# Altium PCB wsg1.0.PcbDoc (part 1 of 3)
Units mm, origin at the board's own origin, x right, y up, seen from the top; angles counter-clockwise.
Board outline 55.37 x 28.61 mm, 4 copper layers (F.Cu, In1.Cu, In2.Cu, B.Cu); 38 components, 55 nets, 181 pads, 63 vias.
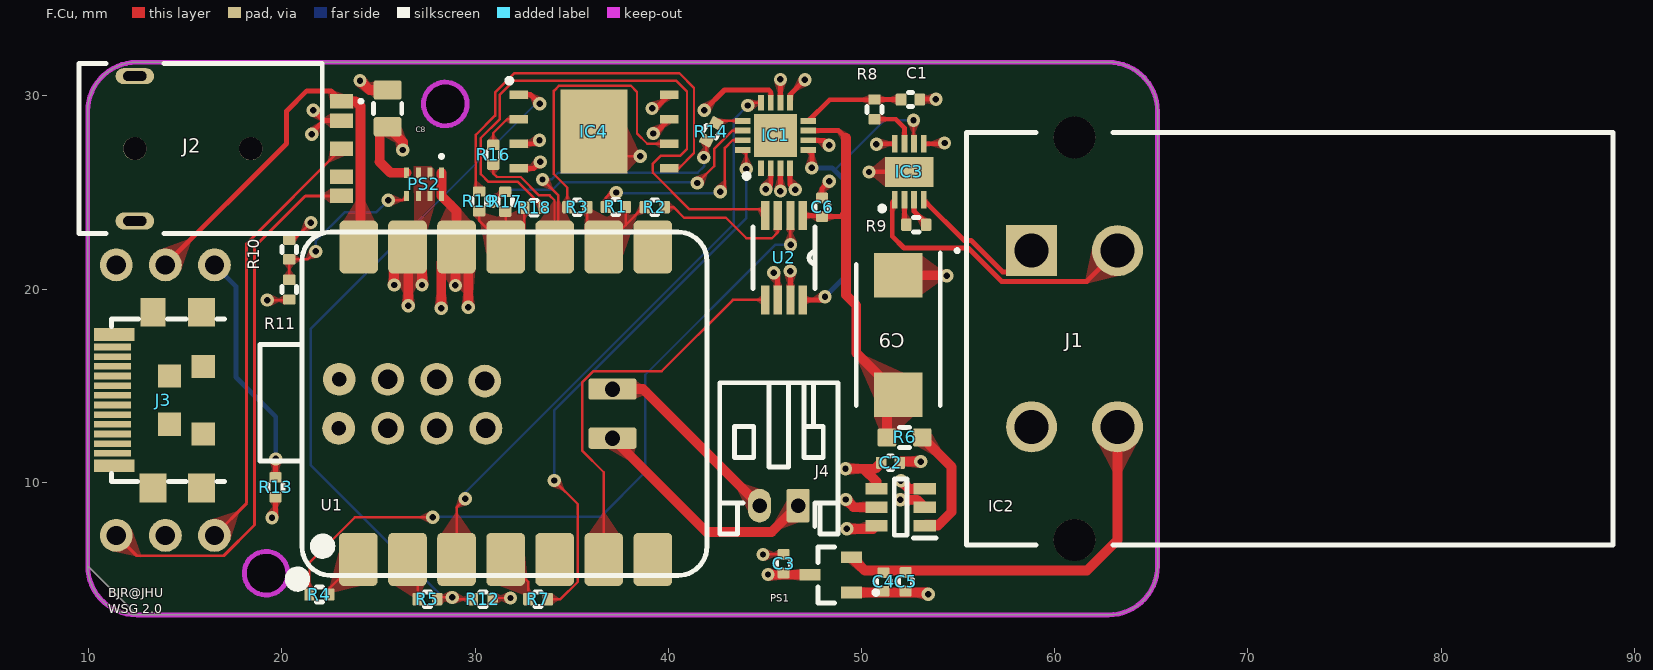
[diagram p0: F.Cu view]
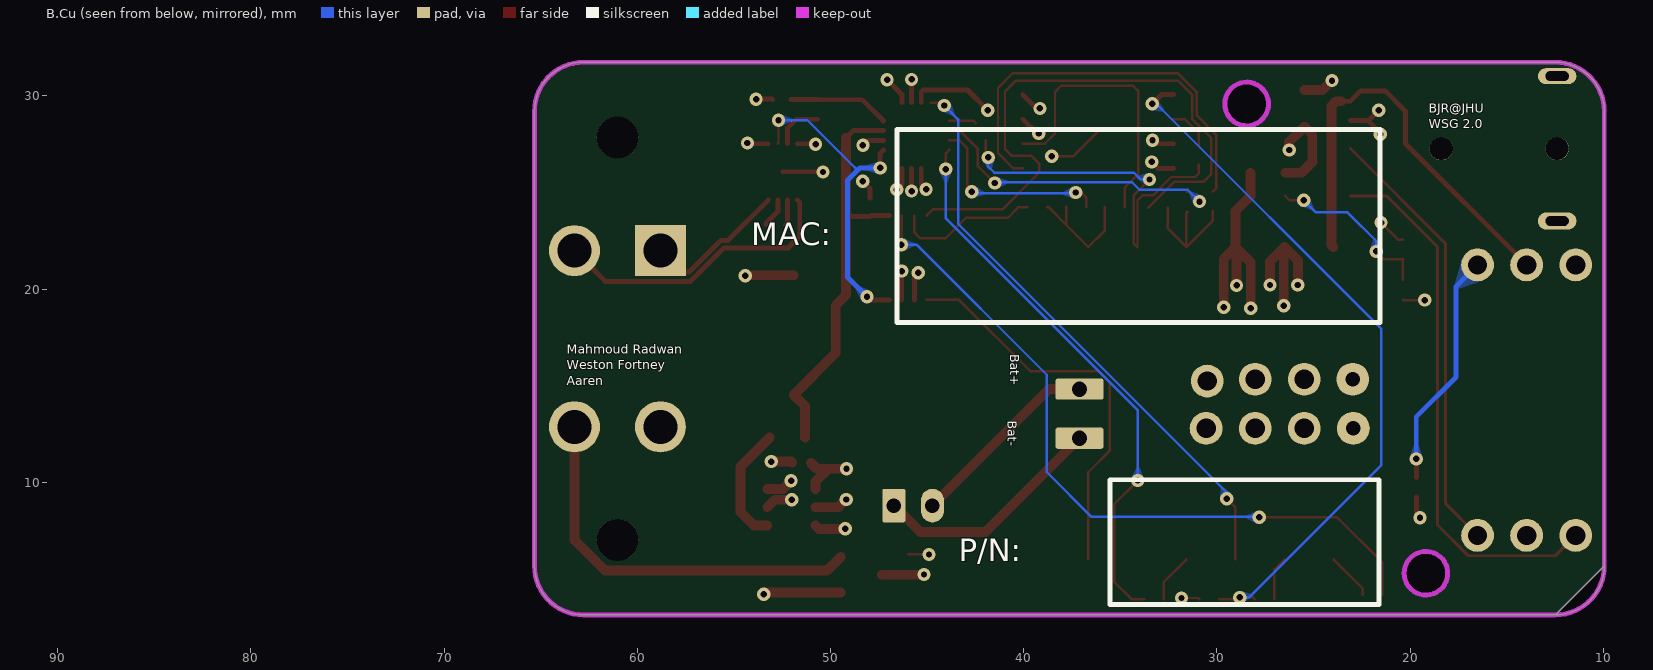
[diagram p1: B.Cu view, seen from below]
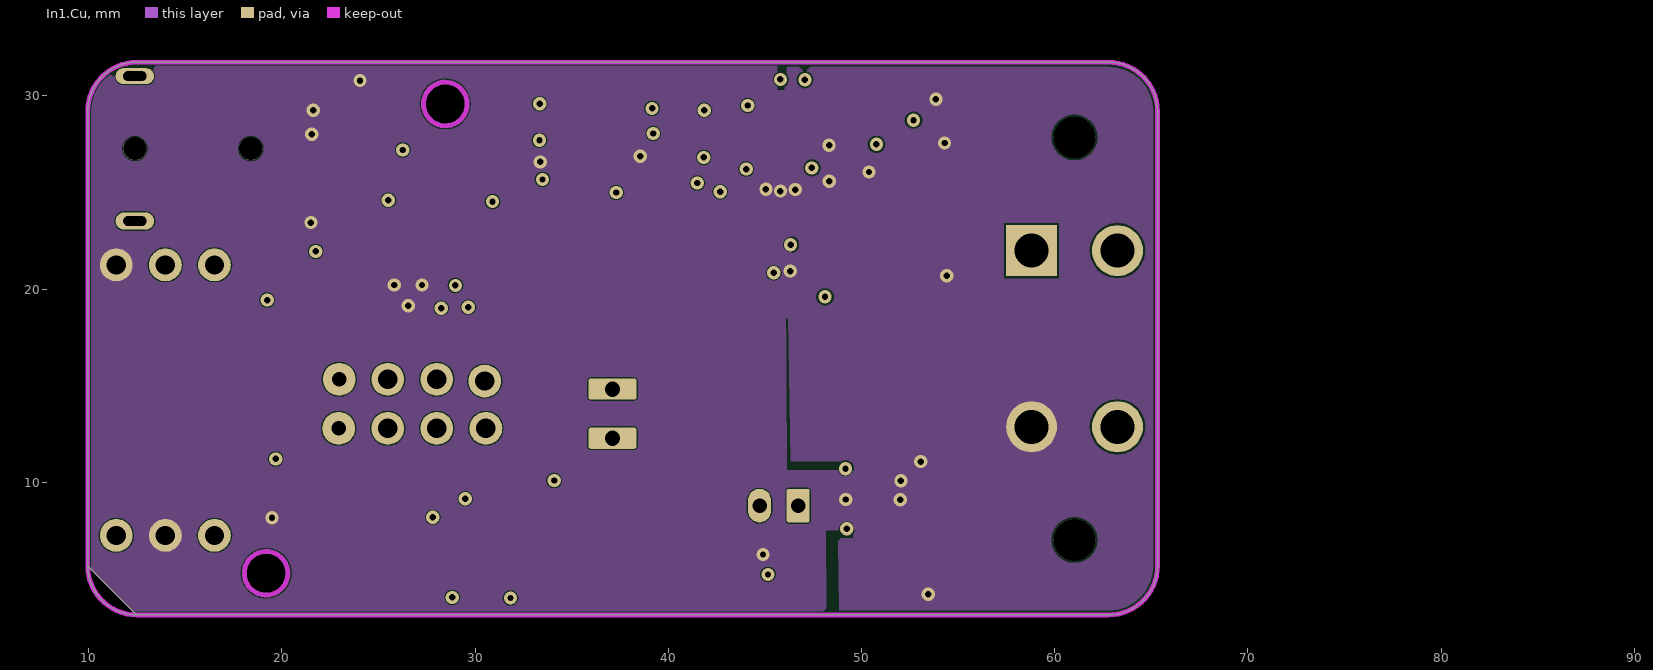
[diagram p2: In1.Cu]
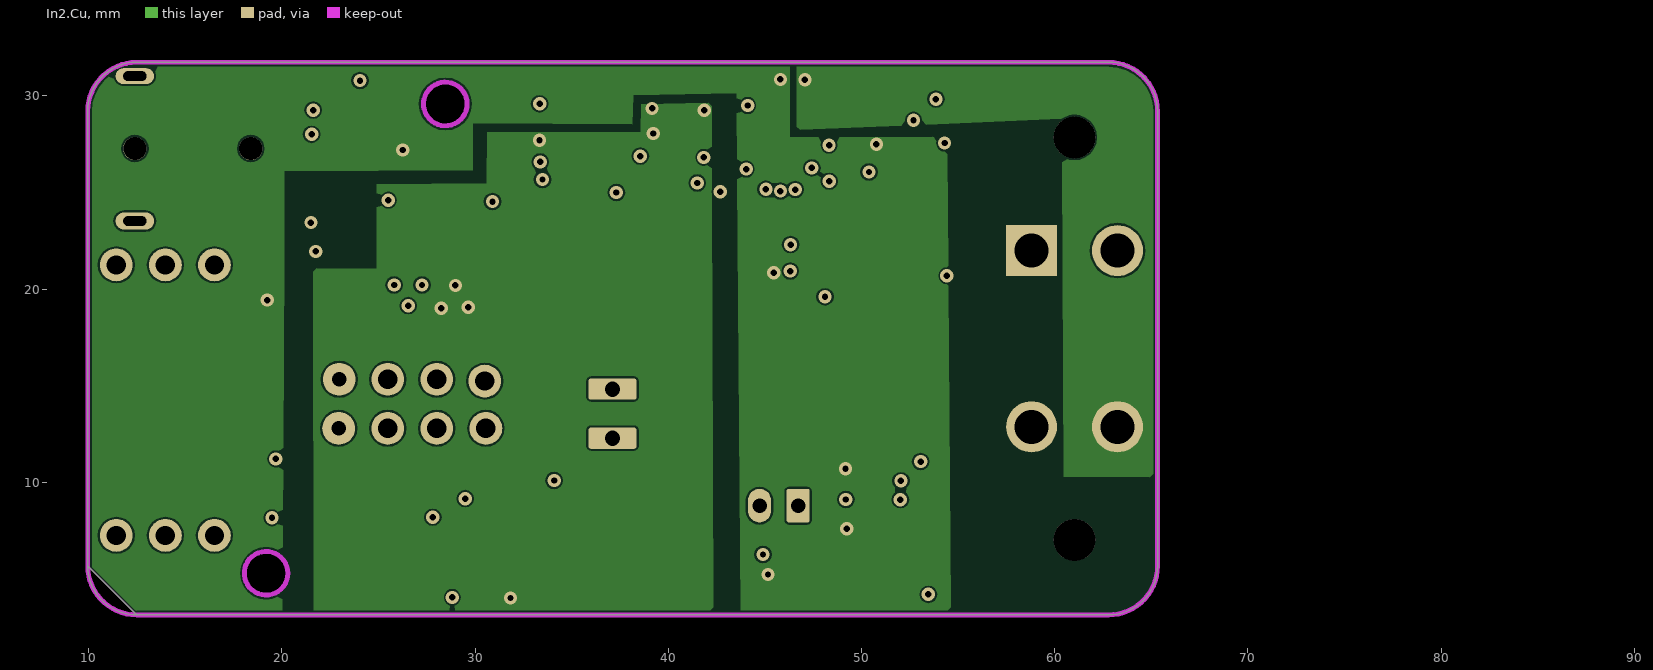
[diagram p3: In2.Cu]

## Layer stack, top to bottom
F.Mask: solder mask 0.0102, Solder Resist, Dk 3.5
F.Cu: signal copper 0.0356
Dielectric 1: dielectric 0.32, FR-4, Dk 4.8
In1.Cu: signal copper 0.0356
Dielectric2: dielectric 0.32, FR-4, Dk 4.8
In2.Cu: signal copper 0.0356
Dielectric3: dielectric 0.32, FR-4, Dk 4.8
B.Cu: signal copper 0.0356
B.Mask: solder mask 0.0102, Solder Resist, Dk 3.5

## Board outline
9.95,5.672 ccw(c12.49,5.672) 12.49,3.132 62.782,3.132 ccw(c62.782,5.672) 65.322,5.672 65.322,29.199 ccw(c62.782,29.199) 12.49,31.739 ccw(c12.49,29.199) 9.95,29.199 9.95,5.672 ccw(c12.49,5.672) 9.95,5.672
cut-out: 20.321,5.291 20.282,5.586 20.169,5.861 19.987,6.097 19.751,6.279 19.476,6.392 19.181,6.431 18.886,6.392 18.611,6.279 18.375,6.097 18.194,5.861 18.08,5.586 18.041,5.291 18.08,4.996 18.194,4.721 18.375,4.485 18.611,4.304 18.886,4.19 19.181,4.151 19.476,4.19 19.751,4.304 19.987,4.485 20.169,4.721 20.282,4.996 20.321,5.291
cut-out: 29.6,29.58 29.561,29.875 29.448,30.15 29.266,30.386 29.03,30.567 28.755,30.681 28.46,30.72 28.165,30.681 27.89,30.567 27.654,30.386 27.473,30.15 27.359,29.875 27.32,29.58 27.359,29.285 27.473,29.01 27.654,28.774 27.89,28.593 28.165,28.479 28.46,28.44 28.755,28.479 29.03,28.593 29.266,28.774 29.448,29.01 29.561,29.285 29.6,29.58

## Design rules (kind name [scope] priority, off if disabled: settings)
Clearance "Clearence 0.1_Polygon" [InNamedPolygon('F.Cu-GNDA-15') OR InNamedPolygon('In1.Cu-GNDA') OR InNamedPolygon('In1.Cu-GNDA-1') OR InNamedPolygon('In1.Cu-GNDA-2') OR InNamedPolygon('In1.Cu-GNDA-4') OR InNamedPolygon('In2.Cu-3V3') OR InNamedPolygon('In2.Cu-5V5') OR InNamedPolygon('In2.Cu-2V5 Ref')] p1: gap=0.1 ignorepadtopadclearanceinfootprint=FALSE
Clearance "Clearence 0.05_Polygon" [InNamedPolygon('In1.Cu-GNDA-3')] p2: gap=0.05 ignorepadtopadclearanceinfootprint=FALSE
MinimumSolderMaskSliver [All] p1: minsoldermaskwidth=0
PolygonConnect Polygon_B.Cu-CS-MEM-1_ConnectDirect [IsNamedPolygon('B.Cu-CS-MEM-1')] p1: connectstyle=Direct reliefconductorwidth=0.254 reliefentries=4 polygonreliefangle="90 Angle" airgapwidth=0.254
PolygonConnect "Polygon_B.Cu-DAC Bias-4_ConnectDirect" [IsNamedPolygon('B.Cu-DAC Bias-4')] p2: connectstyle=Direct reliefconductorwidth=0.254 reliefentries=4 polygonreliefangle="90 Angle" airgapwidth=0.254
PolygonConnect Polygon_B.Cu-CS-ADC-1_ConnectDirect [IsNamedPolygon('B.Cu-CS-ADC-1')] p3: connectstyle=Direct reliefconductorwidth=0.254 reliefentries=4 polygonreliefangle="90 Angle" airgapwidth=0.254
PolygonConnect Polygon_B.Cu-Net-(J3-CC)-1_ConnectDirect [IsNamedPolygon('B.Cu-Net-(J3-CC)-1')] p4: connectstyle=Direct reliefconductorwidth=0.254 reliefentries=4 polygonreliefangle="90 Angle" airgapwidth=0.254
PolygonConnect Polygon_B.Cu-MOSI_ADC-1_ConnectDirect [IsNamedPolygon('B.Cu-MOSI_ADC-1')] p5: connectstyle=Direct reliefconductorwidth=0.254 reliefentries=4 polygonreliefangle="90 Angle" airgapwidth=0.254
PolygonConnect "Polygon_B.Cu-DAC Bias-3_ConnectDirect" [IsNamedPolygon('B.Cu-DAC Bias-3')] p6: connectstyle=Direct reliefconductorwidth=0.254 reliefentries=4 polygonreliefangle="90 Angle" airgapwidth=0.254
PolygonConnect "Polygon_B.Cu-ADC DReady-1_ConnectDirect" [IsNamedPolygon('B.Cu-ADC DReady-1')] p7: connectstyle=Direct reliefconductorwidth=0.254 reliefentries=4 polygonreliefangle="90 Angle" airgapwidth=0.254
PolygonConnect Polygon_B.Cu-CS-DAC-1_ConnectDirect [IsNamedPolygon('B.Cu-CS-DAC-1')] p8: connectstyle=Direct reliefconductorwidth=0.254 reliefentries=4 polygonreliefangle="90 Angle" airgapwidth=0.254
PolygonConnect Polygon_B.Cu-SCLK_ADC-1_ConnectDirect [IsNamedPolygon('B.Cu-SCLK_ADC-1')] p9: connectstyle=Direct reliefconductorwidth=0.254 reliefentries=4 polygonreliefangle="90 Angle" airgapwidth=0.254
PolygonConnect Polygon_B.Cu-CS-DAC_ConnectDirect [IsNamedPolygon('B.Cu-CS-DAC')] p10: connectstyle=Direct reliefconductorwidth=0.254 reliefentries=4 polygonreliefangle="90 Angle" airgapwidth=0.254
PolygonConnect Polygon_B.Cu-Net-(PS2-FB)-1_ConnectDirect [IsNamedPolygon('B.Cu-Net-(PS2-FB)-1')] p11: connectstyle=Direct reliefconductorwidth=0.254 reliefentries=4 polygonreliefangle="90 Angle" airgapwidth=0.254
PolygonConnect "Polygon_B.Cu-DAC Bias-2_ConnectDirect" [IsNamedPolygon('B.Cu-DAC Bias-2')] p12: connectstyle=Direct reliefconductorwidth=0.254 reliefentries=4 polygonreliefangle="90 Angle" airgapwidth=0.254
PolygonConnect Polygon_B.Cu-Net-(J3-CC)_ConnectDirect [IsNamedPolygon('B.Cu-Net-(J3-CC)')] p13: connectstyle=Direct reliefconductorwidth=0.254 reliefentries=4 polygonreliefangle="90 Angle" airgapwidth=0.254
PolygonConnect Polygon_B.Cu-CS-MEM_ConnectDirect [IsNamedPolygon('B.Cu-CS-MEM')] p14: connectstyle=Direct reliefconductorwidth=0.254 reliefentries=4 polygonreliefangle="90 Angle" airgapwidth=0.254
PolygonConnect "Polygon_B.Cu-ADC DReady_ConnectDirect" [IsNamedPolygon('B.Cu-ADC DReady')] p15: connectstyle=Direct reliefconductorwidth=0.254 reliefentries=4 polygonreliefangle="90 Angle" airgapwidth=0.254
PolygonConnect Polygon_B.Cu-MOSI_ADC_ConnectDirect [IsNamedPolygon('B.Cu-MOSI_ADC')] p16: connectstyle=Direct reliefconductorwidth=0.254 reliefentries=4 polygonreliefangle="90 Angle" airgapwidth=0.254
PolygonConnect Polygon_B.Cu-CS-ADC_ConnectDirect [IsNamedPolygon('B.Cu-CS-ADC')] p17: connectstyle=Direct reliefconductorwidth=0.254 reliefentries=4 polygonreliefangle="90 Angle" airgapwidth=0.254
PolygonConnect Polygon_B.Cu-Net-(PS2-FB)_ConnectDirect [IsNamedPolygon('B.Cu-Net-(PS2-FB)')] p18: connectstyle=Direct reliefconductorwidth=0.254 reliefentries=4 polygonreliefangle="90 Angle" airgapwidth=0.254
PolygonConnect "Polygon_B.Cu-DAC Bias-1_ConnectDirect" [IsNamedPolygon('B.Cu-DAC Bias-1')] p19: connectstyle=Direct reliefconductorwidth=0.254 reliefentries=4 polygonreliefangle="90 Angle" airgapwidth=0.254
PolygonConnect "Polygon_B.Cu-DAC Bias_ConnectDirect" [IsNamedPolygon('B.Cu-DAC Bias')] p20: connectstyle=Direct reliefconductorwidth=0.254 reliefentries=4 polygonreliefangle="90 Angle" airgapwidth=0.254
PolygonConnect Polygon_B.Cu-SCLK_ADC_ConnectDirect [IsNamedPolygon('B.Cu-SCLK_ADC')] p21: connectstyle=Direct reliefconductorwidth=0.254 reliefentries=4 polygonreliefangle="90 Angle" airgapwidth=0.254
PolygonConnect Polygon_B.Cu-MISO-1_ConnectDirect [IsNamedPolygon('B.Cu-MISO-1')] p22: connectstyle=Direct reliefconductorwidth=0.254 reliefentries=4 polygonreliefangle="90 Angle" airgapwidth=0.254
PolygonConnect Polygon_B.Cu-MISO_ConnectDirect [IsNamedPolygon('B.Cu-MISO')] p23: connectstyle=Direct reliefconductorwidth=0.254 reliefentries=4 polygonreliefangle="90 Angle" airgapwidth=0.254
PolygonConnect "Polygon_In2.Cu-2V5 Ref_ConnectDirect" [IsNamedPolygon('In2.Cu-2V5 Ref')] p24: connectstyle=Direct reliefconductorwidth=0.254 reliefentries=4 polygonreliefangle="90 Angle" airgapwidth=0.254
PolygonConnect Polygon_In2.Cu-5V5_ConnectDirect [IsNamedPolygon('In2.Cu-5V5')] p25: connectstyle=Direct reliefconductorwidth=0.254 reliefentries=4 polygonreliefangle="90 Angle" airgapwidth=0.254
PolygonConnect Polygon_In2.Cu-3V3_ConnectDirect [IsNamedPolygon('In2.Cu-3V3')] p26: connectstyle=Direct reliefconductorwidth=0.254 reliefentries=4 polygonreliefangle="90 Angle" airgapwidth=0.254
PolygonConnect Polygon_In1.Cu-GNDA-4_ConnectDirect [IsNamedPolygon('In1.Cu-GNDA-4')] p27: connectstyle=Direct reliefconductorwidth=0.254 reliefentries=4 polygonreliefangle="90 Angle" airgapwidth=0.254
PolygonConnect Polygon_In1.Cu-GNDA-3_ConnectDirect [IsNamedPolygon('In1.Cu-GNDA-3')] p28: connectstyle=Direct reliefconductorwidth=0.254 reliefentries=4 polygonreliefangle="90 Angle" airgapwidth=0.254
PolygonConnect Polygon_In1.Cu-GNDA-2_ConnectDirect [IsNamedPolygon('In1.Cu-GNDA-2')] p29: connectstyle=Direct reliefconductorwidth=0.254 reliefentries=4 polygonreliefangle="90 Angle" airgapwidth=0.254
PolygonConnect Polygon_In1.Cu-GNDA-1_ConnectDirect [IsNamedPolygon('In1.Cu-GNDA-1')] p30: connectstyle=Direct reliefconductorwidth=0.254 reliefentries=4 polygonreliefangle="90 Angle" airgapwidth=0.254
PolygonConnect Polygon_In1.Cu-GNDA_ConnectDirect [IsNamedPolygon('In1.Cu-GNDA')] p31: connectstyle=Direct reliefconductorwidth=0.254 reliefentries=4 polygonreliefangle="90 Angle" airgapwidth=0.254
PolygonConnect "Polygon_F.Cu-DAC Bias-5_ConnectDirect" [IsNamedPolygon('F.Cu-DAC Bias-5')] p32: connectstyle=Direct reliefconductorwidth=0.254 reliefentries=4 polygonreliefangle="90 Angle" airgapwidth=0.254
PolygonConnect "Polygon_F.Cu-DAC Bias-4_ConnectDirect" [IsNamedPolygon('F.Cu-DAC Bias-4')] p33: connectstyle=Direct reliefconductorwidth=0.254 reliefentries=4 polygonreliefangle="90 Angle" airgapwidth=0.254
PolygonConnect Polygon_F.Cu-Net-(PS2-FB)-5_ConnectDirect [IsNamedPolygon('F.Cu-Net-(PS2-FB)-5')] p34: connectstyle=Direct reliefconductorwidth=0.254 reliefentries=4 polygonreliefangle="90 Angle" airgapwidth=0.254
PolygonConnect Polygon_F.Cu-CS-DAC-3_ConnectDirect [IsNamedPolygon('F.Cu-CS-DAC-3')] p35: connectstyle=Direct reliefconductorwidth=0.254 reliefentries=4 polygonreliefangle="90 Angle" airgapwidth=0.254
PolygonConnect Polygon_F.Cu-MOSI-5_ConnectDirect [IsNamedPolygon('F.Cu-MOSI-5')] p36: connectstyle=Direct reliefconductorwidth=0.254 reliefentries=4 polygonreliefangle="90 Angle" airgapwidth=0.254
PolygonConnect Polygon_F.Cu-GNDA-48_ConnectDirect [IsNamedPolygon('F.Cu-GNDA-48')] p37: connectstyle=Direct reliefconductorwidth=0.254 reliefentries=4 polygonreliefangle="90 Angle" airgapwidth=0.254
PolygonConnect Polygon_F.Cu-MOSI_FLASH-1_ConnectDirect [IsNamedPolygon('F.Cu-MOSI_FLASH-1')] p38: connectstyle=Direct reliefconductorwidth=0.254 reliefentries=4 polygonreliefangle="90 Angle" airgapwidth=0.254
PolygonConnect Polygon_F.Cu-FilteredSig-3_ConnectDirect [IsNamedPolygon('F.Cu-FilteredSig-3')] p39: connectstyle=Direct reliefconductorwidth=0.254 reliefentries=4 polygonreliefangle="90 Angle" airgapwidth=0.254
PolygonConnect Polygon_F.Cu-CS-ADC-3_ConnectDirect [IsNamedPolygon('F.Cu-CS-ADC-3')] p40: connectstyle=Direct reliefconductorwidth=0.254 reliefentries=4 polygonreliefangle="90 Angle" airgapwidth=0.254
PolygonConnect Polygon_F.Cu-GNDA-47_ConnectDirect [IsNamedPolygon('F.Cu-GNDA-47')] p41: connectstyle=Direct reliefconductorwidth=0.254 reliefentries=4 polygonreliefangle="90 Angle" airgapwidth=0.254
PolygonConnect Polygon_F.Cu-SCLK_ADC-3_ConnectDirect [IsNamedPolygon('F.Cu-SCLK_ADC-3')] p42: connectstyle=Direct reliefconductorwidth=0.254 reliefentries=4 polygonreliefangle="90 Angle" airgapwidth=0.254
PolygonConnect "Polygon_F.Cu-5V Reference-7_ConnectDirect" [IsNamedPolygon('F.Cu-5V Reference-7')] p43: connectstyle=Direct reliefconductorwidth=0.254 reliefentries=4 polygonreliefangle="90 Angle" airgapwidth=0.254
PolygonConnect Polygon_F.Cu-3V3-15_ConnectDirect [IsNamedPolygon('F.Cu-3V3-15')] p44: connectstyle=Direct reliefconductorwidth=0.254 reliefentries=4 polygonreliefangle="90 Angle" airgapwidth=0.254
PolygonConnect Polygon_F.Cu-MOSI-4_ConnectDirect [IsNamedPolygon('F.Cu-MOSI-4')] p45: connectstyle=Direct reliefconductorwidth=0.254 reliefentries=4 polygonreliefangle="90 Angle" airgapwidth=0.254
PolygonConnect Polygon_F.Cu-5V5-15_ConnectDirect [IsNamedPolygon('F.Cu-5V5-15')] p46: connectstyle=Direct reliefconductorwidth=0.254 reliefentries=4 polygonreliefangle="90 Angle" airgapwidth=0.254
PolygonConnect Polygon_F.Cu-MISO_ADC-1_ConnectDirect [IsNamedPolygon('F.Cu-MISO_ADC-1')] p47: connectstyle=Direct reliefconductorwidth=0.254 reliefentries=4 polygonreliefangle="90 Angle" airgapwidth=0.254
PolygonConnect Polygon_F.Cu-GNDA-46_ConnectDirect [IsNamedPolygon('F.Cu-GNDA-46')] p48: connectstyle=Direct reliefconductorwidth=0.254 reliefentries=4 polygonreliefangle="90 Angle" airgapwidth=0.254
PolygonConnect Polygon_F.Cu-3V3-14_ConnectDirect [IsNamedPolygon('F.Cu-3V3-14')] p49: connectstyle=Direct reliefconductorwidth=0.254 reliefentries=4 polygonreliefangle="90 Angle" airgapwidth=0.254
PolygonConnect Polygon_F.Cu-GNDA-45_ConnectDirect [IsNamedPolygon('F.Cu-GNDA-45')] p50: connectstyle=Direct reliefconductorwidth=0.254 reliefentries=4 polygonreliefangle="90 Angle" airgapwidth=0.254
PolygonConnect Polygon_F.Cu-GNDA-44_ConnectDirect [IsNamedPolygon('F.Cu-GNDA-44')] p51: connectstyle=Direct reliefconductorwidth=0.254 reliefentries=4 polygonreliefangle="90 Angle" airgapwidth=0.254
PolygonConnect Polygon_F.Cu-GNDA-43_ConnectDirect [IsNamedPolygon('F.Cu-GNDA-43')] p52: connectstyle=Direct reliefconductorwidth=0.254 reliefentries=4 polygonreliefangle="90 Angle" airgapwidth=0.254
PolygonConnect Polygon_F.Cu-MISO-5_ConnectDirect [IsNamedPolygon('F.Cu-MISO-5')] p53: connectstyle=Direct reliefconductorwidth=0.254 reliefentries=4 polygonreliefangle="90 Angle" airgapwidth=0.254
PolygonConnect "Polygon_F.Cu-2V5 Ref-3_ConnectDirect" [IsNamedPolygon('F.Cu-2V5 Ref-3')] p54: connectstyle=Direct reliefconductorwidth=0.254 reliefentries=4 polygonreliefangle="90 Angle" airgapwidth=0.254
PolygonConnect Polygon_F.Cu-3V3-13_ConnectDirect [IsNamedPolygon('F.Cu-3V3-13')] p55: connectstyle=Direct reliefconductorwidth=0.254 reliefentries=4 polygonreliefangle="90 Angle" airgapwidth=0.254
PolygonConnect Polygon_F.Cu-GNDA-42_ConnectDirect [IsNamedPolygon('F.Cu-GNDA-42')] p56: connectstyle=Direct reliefconductorwidth=0.254 reliefentries=4 polygonreliefangle="90 Angle" airgapwidth=0.254
PolygonConnect Polygon_F.Cu-Net-(U1-PA4_A1_D1)-1_ConnectDirect [IsNamedPolygon('F.Cu-Net-(U1-PA4_A1_D1)-1')] p57: connectstyle=Direct reliefconductorwidth=0.254 reliefentries=4 polygonreliefangle="90 Angle" airgapwidth=0.254
PolygonConnect Polygon_F.Cu-MOSI_ADC-3_ConnectDirect [IsNamedPolygon('F.Cu-MOSI_ADC-3')] p58: connectstyle=Direct reliefconductorwidth=0.254 reliefentries=4 polygonreliefangle="90 Angle" airgapwidth=0.254
PolygonConnect "Polygon_F.Cu-5V USB-5_ConnectDirect" [IsNamedPolygon('F.Cu-5V USB-5')] p59: connectstyle=Direct reliefconductorwidth=0.254 reliefentries=4 polygonreliefangle="90 Angle" airgapwidth=0.254
PolygonConnect Polygon_F.Cu-AmplifiedSig-1_ConnectDirect [IsNamedPolygon('F.Cu-AmplifiedSig-1')] p60: connectstyle=Direct reliefconductorwidth=0.254 reliefentries=4 polygonreliefangle="90 Angle" airgapwidth=0.254
PolygonConnect Polygon_F.Cu-GNDA-41_ConnectDirect [IsNamedPolygon('F.Cu-GNDA-41')] p61: connectstyle=Direct reliefconductorwidth=0.254 reliefentries=4 polygonreliefangle="90 Angle" airgapwidth=0.254
PolygonConnect Polygon_F.Cu-GNDA-40_ConnectDirect [IsNamedPolygon('F.Cu-GNDA-40')] p62: connectstyle=Direct reliefconductorwidth=0.254 reliefentries=4 polygonreliefangle="90 Angle" airgapwidth=0.254
PolygonConnect Polygon_F.Cu-SCLK-5_ConnectDirect [IsNamedPolygon('F.Cu-SCLK-5')] p63: connectstyle=Direct reliefconductorwidth=0.254 reliefentries=4 polygonreliefangle="90 Angle" airgapwidth=0.254
PolygonConnect Polygon_F.Cu-5V5-14_ConnectDirect [IsNamedPolygon('F.Cu-5V5-14')] p64: connectstyle=Direct reliefconductorwidth=0.254 reliefentries=4 polygonreliefangle="90 Angle" airgapwidth=0.254
PolygonConnect Polygon_F.Cu-SCLK_FLASH-1_ConnectDirect [IsNamedPolygon('F.Cu-SCLK_FLASH-1')] p65: connectstyle=Direct reliefconductorwidth=0.254 reliefentries=4 polygonreliefangle="90 Angle" airgapwidth=0.254
PolygonConnect Polygon_F.Cu-BAT--1_ConnectDirect [IsNamedPolygon('F.Cu-BAT--1')] p66: connectstyle=Direct reliefconductorwidth=0.254 reliefentries=4 polygonreliefangle="90 Angle" airgapwidth=0.254
PolygonConnect Polygon_F.Cu-MISO-4_ConnectDirect [IsNamedPolygon('F.Cu-MISO-4')] p67: connectstyle=Direct reliefconductorwidth=0.254 reliefentries=4 polygonreliefangle="90 Angle" airgapwidth=0.254
PolygonConnect Polygon_F.Cu-FilteredSig-2_ConnectDirect [IsNamedPolygon('F.Cu-FilteredSig-2')] p68: connectstyle=Direct reliefconductorwidth=0.254 reliefentries=4 polygonreliefangle="90 Angle" airgapwidth=0.254
PolygonConnect Polygon_F.Cu-MOSI_ADC-2_ConnectDirect [IsNamedPolygon('F.Cu-MOSI_ADC-2')] p69: connectstyle=Direct reliefconductorwidth=0.254 reliefentries=4 polygonreliefangle="90 Angle" airgapwidth=0.254
PolygonConnect Polygon_F.Cu-MOSI_FLASH_ConnectDirect [IsNamedPolygon('F.Cu-MOSI_FLASH')] p70: connectstyle=Direct reliefconductorwidth=0.254 reliefentries=4 polygonreliefangle="90 Angle" airgapwidth=0.254
PolygonConnect Polygon_F.Cu-GNDA-39_ConnectDirect [IsNamedPolygon('F.Cu-GNDA-39')] p71: connectstyle=Direct reliefconductorwidth=0.254 reliefentries=4 polygonreliefangle="90 Angle" airgapwidth=0.254
PolygonConnect "Polygon_F.Cu-5V Reference-6_ConnectDirect" [IsNamedPolygon('F.Cu-5V Reference-6')] p72: connectstyle=Direct reliefconductorwidth=0.254 reliefentries=4 polygonreliefangle="90 Angle" airgapwidth=0.254
PolygonConnect Polygon_F.Cu-GNDA-38_ConnectDirect [IsNamedPolygon('F.Cu-GNDA-38')] p73: connectstyle=Direct reliefconductorwidth=0.254 reliefentries=4 polygonreliefangle="90 Angle" airgapwidth=0.254
PolygonConnect "Polygon_F.Cu-5V USB-4_ConnectDirect" [IsNamedPolygon('F.Cu-5V USB-4')] p74: connectstyle=Direct reliefconductorwidth=0.254 reliefentries=4 polygonreliefangle="90 Angle" airgapwidth=0.254
PolygonConnect Polygon_F.Cu-GNDA-37_ConnectDirect [IsNamedPolygon('F.Cu-GNDA-37')] p75: connectstyle=Direct reliefconductorwidth=0.254 reliefentries=4 polygonreliefangle="90 Angle" airgapwidth=0.254
PolygonConnect Polygon_F.Cu-3V3-12_ConnectDirect [IsNamedPolygon('F.Cu-3V3-12')] p76: connectstyle=Direct reliefconductorwidth=0.254 reliefentries=4 polygonreliefangle="90 Angle" airgapwidth=0.254
PolygonConnect Polygon_F.Cu-Net-(U1-PA02_A0_D0)-1_ConnectDirect [IsNamedPolygon('F.Cu-Net-(U1-PA02_A0_D0)-1')] p77: connectstyle=Direct reliefconductorwidth=0.254 reliefentries=4 polygonreliefangle="90 Angle" airgapwidth=0.254
PolygonConnect "Polygon_F.Cu-5V Reference-5_ConnectDirect" [IsNamedPolygon('F.Cu-5V Reference-5')] p78: connectstyle=Direct reliefconductorwidth=0.254 reliefentries=4 polygonreliefangle="90 Angle" airgapwidth=0.254
PolygonConnect Polygon_F.Cu-USB_D+-1_ConnectDirect [IsNamedPolygon('F.Cu-USB_D+-1')] p79: connectstyle=Direct reliefconductorwidth=0.254 reliefentries=4 polygonreliefangle="90 Angle" airgapwidth=0.254
PolygonConnect Polygon_F.Cu-GNDA-36_ConnectDirect [IsNamedPolygon('F.Cu-GNDA-36')] p80: connectstyle=Direct reliefconductorwidth=0.254 reliefentries=4 polygonreliefangle="90 Angle" airgapwidth=0.254
PolygonConnect Polygon_F.Cu-USB_D--1_ConnectDirect [IsNamedPolygon('F.Cu-USB_D--1')] p81: connectstyle=Direct reliefconductorwidth=0.254 reliefentries=4 polygonreliefangle="90 Angle" airgapwidth=0.254
PolygonConnect Polygon_F.Cu-MISO_FLASH-1_ConnectDirect [IsNamedPolygon('F.Cu-MISO_FLASH-1')] p82: connectstyle=Direct reliefconductorwidth=0.254 reliefentries=4 polygonreliefangle="90 Angle" airgapwidth=0.254
PolygonConnect Polygon_F.Cu-LDAC-DAC-1_ConnectDirect [IsNamedPolygon('F.Cu-LDAC-DAC-1')] p83: connectstyle=Direct reliefconductorwidth=0.254 reliefentries=4 polygonreliefangle="90 Angle" airgapwidth=0.254
PolygonConnect Polygon_F.Cu-3V3-11_ConnectDirect [IsNamedPolygon('F.Cu-3V3-11')] p84: connectstyle=Direct reliefconductorwidth=0.254 reliefentries=4 polygonreliefangle="90 Angle" airgapwidth=0.254
PolygonConnect Polygon_F.Cu-MISO-3_ConnectDirect [IsNamedPolygon('F.Cu-MISO-3')] p85: connectstyle=Direct reliefconductorwidth=0.254 reliefentries=4 polygonreliefangle="90 Angle" airgapwidth=0.254
PolygonConnect Polygon_F.Cu-MOSI_ADC-1_ConnectDirect [IsNamedPolygon('F.Cu-MOSI_ADC-1')] p86: connectstyle=Direct reliefconductorwidth=0.254 reliefentries=4 polygonreliefangle="90 Angle" airgapwidth=0.254
PolygonConnect Polygon_F.Cu-LDAC-DAC_ConnectDirect [IsNamedPolygon('F.Cu-LDAC-DAC')] p87: connectstyle=Direct reliefconductorwidth=0.254 reliefentries=4 polygonreliefangle="90 Angle" airgapwidth=0.254
PolygonConnect Polygon_F.Cu-MOSI_DAC-1_ConnectDirect [IsNamedPolygon('F.Cu-MOSI_DAC-1')] p88: connectstyle=Direct reliefconductorwidth=0.254 reliefentries=4 polygonreliefangle="90 Angle" airgapwidth=0.254
PolygonConnect Polygon_F.Cu-Net-(U1-PA02_A0_D0)_ConnectDirect [IsNamedPolygon('F.Cu-Net-(U1-PA02_A0_D0)')] p89: connectstyle=Direct reliefconductorwidth=0.254 reliefentries=4 polygonreliefangle="90 Angle" airgapwidth=0.254
PolygonConnect Polygon_F.Cu-5V5-13_ConnectDirect [IsNamedPolygon('F.Cu-5V5-13')] p90: connectstyle=Direct reliefconductorwidth=0.254 reliefentries=4 polygonreliefangle="90 Angle" airgapwidth=0.254
PolygonConnect Polygon_F.Cu-3V3-10_ConnectDirect [IsNamedPolygon('F.Cu-3V3-10')] p91: connectstyle=Direct reliefconductorwidth=0.254 reliefentries=4 polygonreliefangle="90 Angle" airgapwidth=0.254
PolygonConnect Polygon_F.Cu-FilteredSig-1_ConnectDirect [IsNamedPolygon('F.Cu-FilteredSig-1')] p92: connectstyle=Direct reliefconductorwidth=0.254 reliefentries=4 polygonreliefangle="90 Angle" airgapwidth=0.254
PolygonConnect Polygon_F.Cu-S--1_ConnectDirect [IsNamedPolygon('F.Cu-S--1')] p93: connectstyle=Direct reliefconductorwidth=0.254 reliefentries=4 polygonreliefangle="90 Angle" airgapwidth=0.254
PolygonConnect Polygon_F.Cu-Net-(U1-PA11_A3_D3)-1_ConnectDirect [IsNamedPolygon('F.Cu-Net-(U1-PA11_A3_D3)-1')] p94: connectstyle=Direct reliefconductorwidth=0.254 reliefentries=4 polygonreliefangle="90 Angle" airgapwidth=0.254
PolygonConnect Polygon_F.Cu-SCLK_ADC-2_ConnectDirect [IsNamedPolygon('F.Cu-SCLK_ADC-2')] p95: connectstyle=Direct reliefconductorwidth=0.254 reliefentries=4 polygonreliefangle="90 Angle" airgapwidth=0.254
PolygonConnect Polygon_F.Cu-MOSI-3_ConnectDirect [IsNamedPolygon('F.Cu-MOSI-3')] p96: connectstyle=Direct reliefconductorwidth=0.254 reliefentries=4 polygonreliefangle="90 Angle" airgapwidth=0.254
PolygonConnect Polygon_F.Cu-Net-(IC3-RG_1)-1_ConnectDirect [IsNamedPolygon('F.Cu-Net-(IC3-RG_1)-1')] p97: connectstyle=Direct reliefconductorwidth=0.254 reliefentries=4 polygonreliefangle="90 Angle" airgapwidth=0.254
PolygonConnect Polygon_F.Cu-MOSI-2_ConnectDirect [IsNamedPolygon('F.Cu-MOSI-2')] p98: connectstyle=Direct reliefconductorwidth=0.254 reliefentries=4 polygonreliefangle="90 Angle" airgapwidth=0.254
PolygonConnect Polygon_F.Cu-3V3-9_ConnectDirect [IsNamedPolygon('F.Cu-3V3-9')] p99: connectstyle=Direct reliefconductorwidth=0.254 reliefentries=4 polygonreliefangle="90 Angle" airgapwidth=0.254
PolygonConnect "Polygon_F.Cu-5V Reference-4_ConnectDirect" [IsNamedPolygon('F.Cu-5V Reference-4')] p100: connectstyle=Direct reliefconductorwidth=0.254 reliefentries=4 polygonreliefangle="90 Angle" airgapwidth=0.254
PolygonConnect "Polygon_F.Cu-DAC Bias-3_ConnectDirect" [IsNamedPolygon('F.Cu-DAC Bias-3')] p101: connectstyle=Direct reliefconductorwidth=0.254 reliefentries=4 polygonreliefangle="90 Angle" airgapwidth=0.254
PolygonConnect "Polygon_F.Cu-2V5 Ref-2_ConnectDirect" [IsNamedPolygon('F.Cu-2V5 Ref-2')] p102: connectstyle=Direct reliefconductorwidth=0.254 reliefentries=4 polygonreliefangle="90 Angle" airgapwidth=0.254
PolygonConnect Polygon_F.Cu-CS-ADC-2_ConnectDirect [IsNamedPolygon('F.Cu-CS-ADC-2')] p103: connectstyle=Direct reliefconductorwidth=0.254 reliefentries=4 polygonreliefangle="90 Angle" airgapwidth=0.254
PolygonConnect Polygon_F.Cu-Net-(U1-PA11_A3_D3)_ConnectDirect [IsNamedPolygon('F.Cu-Net-(U1-PA11_A3_D3)')] p104: connectstyle=Direct reliefconductorwidth=0.254 reliefentries=4 polygonreliefangle="90 Angle" airgapwidth=0.254
PolygonConnect Polygon_F.Cu-Net-(PS2-FB)-4_ConnectDirect [IsNamedPolygon('F.Cu-Net-(PS2-FB)-4')] p105: connectstyle=Direct reliefconductorwidth=0.254 reliefentries=4 polygonreliefangle="90 Angle" airgapwidth=0.254
PolygonConnect "Polygon_F.Cu-2V5 Ref-1_ConnectDirect" [IsNamedPolygon('F.Cu-2V5 Ref-1')] p106: connectstyle=Direct reliefconductorwidth=0.254 reliefentries=4 polygonreliefangle="90 Angle" airgapwidth=0.254
PolygonConnect Polygon_F.Cu-CS-MEM-5_ConnectDirect [IsNamedPolygon('F.Cu-CS-MEM-5')] p107: connectstyle=Direct reliefconductorwidth=0.254 reliefentries=4 polygonreliefangle="90 Angle" airgapwidth=0.254
PolygonConnect Polygon_F.Cu-3V3-8_ConnectDirect [IsNamedPolygon('F.Cu-3V3-8')] p108: connectstyle=Direct reliefconductorwidth=0.254 reliefentries=4 polygonreliefangle="90 Angle" airgapwidth=0.254
PolygonConnect Polygon_F.Cu-GNDA-35_ConnectDirect [IsNamedPolygon('F.Cu-GNDA-35')] p109: connectstyle=Direct reliefconductorwidth=0.254 reliefentries=4 polygonreliefangle="90 Angle" airgapwidth=0.254
PolygonConnect Polygon_F.Cu-Net-(J3-CC)-1_ConnectDirect [IsNamedPolygon('F.Cu-Net-(J3-CC)-1')] p110: connectstyle=Direct reliefconductorwidth=0.254 reliefentries=4 polygonreliefangle="90 Angle" airgapwidth=0.254
PolygonConnect Polygon_F.Cu-CS-ADC-1_ConnectDirect [IsNamedPolygon('F.Cu-CS-ADC-1')] p111: connectstyle=Direct reliefconductorwidth=0.254 reliefentries=4 polygonreliefangle="90 Angle" airgapwidth=0.254
PolygonConnect Polygon_F.Cu-5V5-12_ConnectDirect [IsNamedPolygon('F.Cu-5V5-12')] p112: connectstyle=Direct reliefconductorwidth=0.254 reliefentries=4 polygonreliefangle="90 Angle" airgapwidth=0.254
PolygonConnect Polygon_F.Cu-Net-(IC3-RG_2)-1_ConnectDirect [IsNamedPolygon('F.Cu-Net-(IC3-RG_2)-1')] p113: connectstyle=Direct reliefconductorwidth=0.254 reliefentries=4 polygonreliefangle="90 Angle" airgapwidth=0.254
PolygonConnect "Polygon_F.Cu-ADC DReady-3_ConnectDirect" [IsNamedPolygon('F.Cu-ADC DReady-3')] p114: connectstyle=Direct reliefconductorwidth=0.254 reliefentries=4 polygonreliefangle="90 Angle" airgapwidth=0.254
PolygonConnect Polygon_F.Cu-GNDA-34_ConnectDirect [IsNamedPolygon('F.Cu-GNDA-34')] p115: connectstyle=Direct reliefconductorwidth=0.254 reliefentries=4 polygonreliefangle="90 Angle" airgapwidth=0.254
PolygonConnect "Polygon_F.Cu-ADC DReady-2_ConnectDirect" [IsNamedPolygon('F.Cu-ADC DReady-2')] p116: connectstyle=Direct reliefconductorwidth=0.254 reliefentries=4 polygonreliefangle="90 Angle" airgapwidth=0.254
PolygonConnect Polygon_F.Cu-GNDA-33_ConnectDirect [IsNamedPolygon('F.Cu-GNDA-33')] p117: connectstyle=Direct reliefconductorwidth=0.254 reliefentries=4 polygonreliefangle="90 Angle" airgapwidth=0.254
PolygonConnect Polygon_F.Cu-GNDA-32_ConnectDirect [IsNamedPolygon('F.Cu-GNDA-32')] p118: connectstyle=Direct reliefconductorwidth=0.254 reliefentries=4 polygonreliefangle="90 Angle" airgapwidth=0.254
PolygonConnect Polygon_F.Cu-GNDA-31_ConnectDirect [IsNamedPolygon('F.Cu-GNDA-31')] p119: connectstyle=Direct reliefconductorwidth=0.254 reliefentries=4 polygonreliefangle="90 Angle" airgapwidth=0.254
PolygonConnect Polygon_F.Cu-GNDA-30_ConnectDirect [IsNamedPolygon('F.Cu-GNDA-30')] p120: connectstyle=Direct reliefconductorwidth=0.254 reliefentries=4 polygonreliefangle="90 Angle" airgapwidth=0.254
PolygonConnect Polygon_F.Cu-MISO_FLASH_ConnectDirect [IsNamedPolygon('F.Cu-MISO_FLASH')] p121: connectstyle=Direct reliefconductorwidth=0.254 reliefentries=4 polygonreliefangle="90 Angle" airgapwidth=0.254
PolygonConnect Polygon_F.Cu-5V5-11_ConnectDirect [IsNamedPolygon('F.Cu-5V5-11')] p122: connectstyle=Direct reliefconductorwidth=0.254 reliefentries=4 polygonreliefangle="90 Angle" airgapwidth=0.254
PolygonConnect Polygon_F.Cu-GNDA-29_ConnectDirect [IsNamedPolygon('F.Cu-GNDA-29')] p123: connectstyle=Direct reliefconductorwidth=0.254 reliefentries=4 polygonreliefangle="90 Angle" airgapwidth=0.254
PolygonConnect Polygon_F.Cu-MOSI-1_ConnectDirect [IsNamedPolygon('F.Cu-MOSI-1')] p124: connectstyle=Direct reliefconductorwidth=0.254 reliefentries=4 polygonreliefangle="90 Angle" airgapwidth=0.254
PolygonConnect Polygon_F.Cu-GNDA-28_ConnectDirect [IsNamedPolygon('F.Cu-GNDA-28')] p125: connectstyle=Direct reliefconductorwidth=0.254 reliefentries=4 polygonreliefangle="90 Angle" airgapwidth=0.254
PolygonConnect Polygon_F.Cu-3V3-7_ConnectDirect [IsNamedPolygon('F.Cu-3V3-7')] p126: connectstyle=Direct reliefconductorwidth=0.254 reliefentries=4 polygonreliefangle="90 Angle" airgapwidth=0.254
PolygonConnect Polygon_F.Cu-GNDA-27_ConnectDirect [IsNamedPolygon('F.Cu-GNDA-27')] p127: connectstyle=Direct reliefconductorwidth=0.254 reliefentries=4 polygonreliefangle="90 Angle" airgapwidth=0.254
PolygonConnect "Polygon_F.Cu-DAC Bias-2_ConnectDirect" [IsNamedPolygon('F.Cu-DAC Bias-2')] p128: connectstyle=Direct reliefconductorwidth=0.254 reliefentries=4 polygonreliefangle="90 Angle" airgapwidth=0.254
PolygonConnect Polygon_F.Cu-GNDA-26_ConnectDirect [IsNamedPolygon('F.Cu-GNDA-26')] p129: connectstyle=Direct reliefconductorwidth=0.254 reliefentries=4 polygonreliefangle="90 Angle" airgapwidth=0.254
PolygonConnect Polygon_F.Cu-S+_ConnectDirect [IsNamedPolygon('F.Cu-S+')] p130: connectstyle=Direct reliefconductorwidth=0.254 reliefentries=4 polygonreliefangle="90 Angle" airgapwidth=0.254
PolygonConnect Polygon_F.Cu-3V3-6_ConnectDirect [IsNamedPolygon('F.Cu-3V3-6')] p131: connectstyle=Direct reliefconductorwidth=0.254 reliefentries=4 polygonreliefangle="90 Angle" airgapwidth=0.254
PolygonConnect "Polygon_F.Cu-5V USB-3_ConnectDirect" [IsNamedPolygon('F.Cu-5V USB-3')] p132: connectstyle=Direct reliefconductorwidth=0.254 reliefentries=4 polygonreliefangle="90 Angle" airgapwidth=0.254
PolygonConnect Polygon_F.Cu-GNDA-25_ConnectDirect [IsNamedPolygon('F.Cu-GNDA-25')] p133: connectstyle=Direct reliefconductorwidth=0.254 reliefentries=4 polygonreliefangle="90 Angle" airgapwidth=0.254
PolygonConnect Polygon_F.Cu-MOSI_DAC_ConnectDirect [IsNamedPolygon('F.Cu-MOSI_DAC')] p134: connectstyle=Direct reliefconductorwidth=0.254 reliefentries=4 polygonreliefangle="90 Angle" airgapwidth=0.254
PolygonConnect "Polygon_F.Cu-2V5 Ref_ConnectDirect" [IsNamedPolygon('F.Cu-2V5 Ref')] p135: connectstyle=Direct reliefconductorwidth=0.254 reliefentries=4 polygonreliefangle="90 Angle" airgapwidth=0.254
PolygonConnect Polygon_F.Cu-GNDA-24_ConnectDirect [IsNamedPolygon('F.Cu-GNDA-24')] p136: connectstyle=Direct reliefconductorwidth=0.254 reliefentries=4 polygonreliefangle="90 Angle" airgapwidth=0.254
PolygonConnect Polygon_F.Cu-GNDA-23_ConnectDirect [IsNamedPolygon('F.Cu-GNDA-23')] p137: connectstyle=Direct reliefconductorwidth=0.254 reliefentries=4 polygonreliefangle="90 Angle" airgapwidth=0.254
PolygonConnect "Polygon_F.Cu-5V Reference-3_ConnectDirect" [IsNamedPolygon('F.Cu-5V Reference-3')] p138: connectstyle=Direct reliefconductorwidth=0.254 reliefentries=4 polygonreliefangle="90 Angle" airgapwidth=0.254
PolygonConnect "Polygon_F.Cu-DAC Bias-1_ConnectDirect" [IsNamedPolygon('F.Cu-DAC Bias-1')] p139: connectstyle=Direct reliefconductorwidth=0.254 reliefentries=4 polygonreliefangle="90 Angle" airgapwidth=0.254
PolygonConnect Polygon_F.Cu-GNDA-22_ConnectDirect [IsNamedPolygon('F.Cu-GNDA-22')] p140: connectstyle=Direct reliefconductorwidth=0.254 reliefentries=4 polygonreliefangle="90 Angle" airgapwidth=0.254
PolygonConnect Polygon_F.Cu-USB_D+_ConnectDirect [IsNamedPolygon('F.Cu-USB_D+')] p141: connectstyle=Direct reliefconductorwidth=0.254 reliefentries=4 polygonreliefangle="90 Angle" airgapwidth=0.254
PolygonConnect Polygon_F.Cu-FilteredSig_ConnectDirect [IsNamedPolygon('F.Cu-FilteredSig')] p142: connectstyle=Direct reliefconductorwidth=0.254 reliefentries=4 polygonreliefangle="90 Angle" airgapwidth=0.254
PolygonConnect "Polygon_F.Cu-5V USB-2_ConnectDirect" [IsNamedPolygon('F.Cu-5V USB-2')] p143: connectstyle=Direct reliefconductorwidth=0.254 reliefentries=4 polygonreliefangle="90 Angle" airgapwidth=0.254
PolygonConnect Polygon_F.Cu-GNDA-21_ConnectDirect [IsNamedPolygon('F.Cu-GNDA-21')] p144: connectstyle=Direct reliefconductorwidth=0.254 reliefentries=4 polygonreliefangle="90 Angle" airgapwidth=0.254
PolygonConnect Polygon_F.Cu-SCLK_ADC-1_ConnectDirect [IsNamedPolygon('F.Cu-SCLK_ADC-1')] p145: connectstyle=Direct reliefconductorwidth=0.254 reliefentries=4 polygonreliefangle="90 Angle" airgapwidth=0.254
PolygonConnect Polygon_F.Cu-MISO-2_ConnectDirect [IsNamedPolygon('F.Cu-MISO-2')] p146: connectstyle=Direct reliefconductorwidth=0.254 reliefentries=4 polygonreliefangle="90 Angle" airgapwidth=0.254
PolygonConnect Polygon_F.Cu-3V3-5_ConnectDirect [IsNamedPolygon('F.Cu-3V3-5')] p147: connectstyle=Direct reliefconductorwidth=0.254 reliefentries=4 polygonreliefangle="90 Angle" airgapwidth=0.254
PolygonConnect Polygon_F.Cu-GNDA-20_ConnectDirect [IsNamedPolygon('F.Cu-GNDA-20')] p148: connectstyle=Direct reliefconductorwidth=0.254 reliefentries=4 polygonreliefangle="90 Angle" airgapwidth=0.254
PolygonConnect Polygon_F.Cu-SCLK-4_ConnectDirect [IsNamedPolygon('F.Cu-SCLK-4')] p149: connectstyle=Direct reliefconductorwidth=0.254 reliefentries=4 polygonreliefangle="90 Angle" airgapwidth=0.254
PolygonConnect Polygon_F.Cu-BAT+-1_ConnectDirect [IsNamedPolygon('F.Cu-BAT+-1')] p150: connectstyle=Direct reliefconductorwidth=0.254 reliefentries=4 polygonreliefangle="90 Angle" airgapwidth=0.254
PolygonConnect "Polygon_F.Cu-5V USB-1_ConnectDirect" [IsNamedPolygon('F.Cu-5V USB-1')] p151: connectstyle=Direct reliefconductorwidth=0.254 reliefentries=4 polygonreliefangle="90 Angle" airgapwidth=0.254
PolygonConnect Polygon_F.Cu-MISO-1_ConnectDirect [IsNamedPolygon('F.Cu-MISO-1')] p152: connectstyle=Direct reliefconductorwidth=0.254 reliefentries=4 polygonreliefangle="90 Angle" airgapwidth=0.254
PolygonConnect Polygon_F.Cu-SCLK_DAC-1_ConnectDirect [IsNamedPolygon('F.Cu-SCLK_DAC-1')] p153: connectstyle=Direct reliefconductorwidth=0.254 reliefentries=4 polygonreliefangle="90 Angle" airgapwidth=0.254
PolygonConnect Polygon_F.Cu-GNDA-19_ConnectDirect [IsNamedPolygon('F.Cu-GNDA-19')] p154: connectstyle=Direct reliefconductorwidth=0.254 reliefentries=4 polygonreliefangle="90 Angle" airgapwidth=0.254
PolygonConnect Polygon_F.Cu-Net-(PS2-FB)-3_ConnectDirect [IsNamedPolygon('F.Cu-Net-(PS2-FB)-3')] p155: connectstyle=Direct reliefconductorwidth=0.254 reliefentries=4 polygonreliefangle="90 Angle" airgapwidth=0.254
PolygonConnect Polygon_F.Cu-GNDA-18_ConnectDirect [IsNamedPolygon('F.Cu-GNDA-18')] p156: connectstyle=Direct reliefconductorwidth=0.254 reliefentries=4 polygonreliefangle="90 Angle" airgapwidth=0.254
PolygonConnect Polygon_F.Cu-CS-MEM-4_ConnectDirect [IsNamedPolygon('F.Cu-CS-MEM-4')] p157: connectstyle=Direct reliefconductorwidth=0.254 reliefentries=4 polygonreliefangle="90 Angle" airgapwidth=0.254
PolygonConnect "Polygon_F.Cu-DAC Bias_ConnectDirect" [IsNamedPolygon('F.Cu-DAC Bias')] p158: connectstyle=Direct reliefconductorwidth=0.254 reliefentries=4 polygonreliefangle="90 Angle" airgapwidth=0.254
PolygonConnect Polygon_F.Cu-5V5-10_ConnectDirect [IsNamedPolygon('F.Cu-5V5-10')] p159: connectstyle=Direct reliefconductorwidth=0.254 reliefentries=4 polygonreliefangle="90 Angle" airgapwidth=0.254
PolygonConnect Polygon_F.Cu-CS-MEM-3_ConnectDirect [IsNamedPolygon('F.Cu-CS-MEM-3')] p160: connectstyle=Direct reliefconductorwidth=0.254 reliefentries=4 polygonreliefangle="90 Angle" airgapwidth=0.254
PolygonConnect Polygon_F.Cu-GNDA-17_ConnectDirect [IsNamedPolygon('F.Cu-GNDA-17')] p161: connectstyle=Direct reliefconductorwidth=0.254 reliefentries=4 polygonreliefangle="90 Angle" airgapwidth=0.254
PolygonConnect Polygon_F.Cu-CS-MEM-2_ConnectDirect [IsNamedPolygon('F.Cu-CS-MEM-2')] p162: connectstyle=Direct reliefconductorwidth=0.254 reliefentries=4 polygonreliefangle="90 Angle" airgapwidth=0.254
PolygonConnect Polygon_F.Cu-GNDA-16_ConnectDirect [IsNamedPolygon('F.Cu-GNDA-16')] p163: connectstyle=Direct reliefconductorwidth=0.254 reliefentries=4 polygonreliefangle="90 Angle" airgapwidth=0.254
PolygonConnect Polygon_F.Cu-5V5-9_ConnectDirect [IsNamedPolygon('F.Cu-5V5-9')] p164: connectstyle=Direct reliefconductorwidth=0.254 reliefentries=4 polygonreliefangle="90 Angle" airgapwidth=0.254
PolygonConnect Polygon_F.Cu-MISO_ConnectDirect [IsNamedPolygon('F.Cu-MISO')] p165: connectstyle=Direct reliefconductorwidth=0.254 reliefentries=4 polygonreliefangle="90 Angle" airgapwidth=0.254
PolygonConnect "Polygon_F.Cu-5V Reference-2_ConnectDirect" [IsNamedPolygon('F.Cu-5V Reference-2')] p166: connectstyle=Direct reliefconductorwidth=0.254 reliefentries=4 polygonreliefangle="90 Angle" airgapwidth=0.254
PolygonConnect Polygon_F.Cu-GNDA-15_ConnectDirect [IsNamedPolygon('F.Cu-GNDA-15')] p167: connectstyle=Direct reliefconductorwidth=0.254 reliefentries=4 polygonreliefangle="90 Angle" airgapwidth=0.254
PolygonConnect "Polygon_F.Cu-5V Reference-1_ConnectDirect" [IsNamedPolygon('F.Cu-5V Reference-1')] p168: connectstyle=Direct reliefconductorwidth=0.254 reliefentries=4 polygonreliefangle="90 Angle" airgapwidth=0.254
PolygonConnect Polygon_F.Cu-Net-(J3-CC)_ConnectDirect [IsNamedPolygon('F.Cu-Net-(J3-CC)')] p169: connectstyle=Direct reliefconductorwidth=0.254 reliefentries=4 polygonreliefangle="90 Angle" airgapwidth=0.254
PolygonConnect Polygon_F.Cu-MISO_ADC_ConnectDirect [IsNamedPolygon('F.Cu-MISO_ADC')] p170: connectstyle=Direct reliefconductorwidth=0.254 reliefentries=4 polygonreliefangle="90 Angle" airgapwidth=0.254
PolygonConnect Polygon_F.Cu-5V5-8_ConnectDirect [IsNamedPolygon('F.Cu-5V5-8')] p171: connectstyle=Direct reliefconductorwidth=0.254 reliefentries=4 polygonreliefangle="90 Angle" airgapwidth=0.254
PolygonConnect Polygon_F.Cu-CS-DAC-2_ConnectDirect [IsNamedPolygon('F.Cu-CS-DAC-2')] p172: connectstyle=Direct reliefconductorwidth=0.254 reliefentries=4 polygonreliefangle="90 Angle" airgapwidth=0.254
PolygonConnect Polygon_F.Cu-5V5-7_ConnectDirect [IsNamedPolygon('F.Cu-5V5-7')] p173: connectstyle=Direct reliefconductorwidth=0.254 reliefentries=4 polygonreliefangle="90 Angle" airgapwidth=0.254
PolygonConnect Polygon_F.Cu-GNDA-14_ConnectDirect [IsNamedPolygon('F.Cu-GNDA-14')] p174: connectstyle=Direct reliefconductorwidth=0.254 reliefentries=4 polygonreliefangle="90 Angle" airgapwidth=0.254
PolygonConnect Polygon_F.Cu-CS-DAC-1_ConnectDirect [IsNamedPolygon('F.Cu-CS-DAC-1')] p175: connectstyle=Direct reliefconductorwidth=0.254 reliefentries=4 polygonreliefangle="90 Angle" airgapwidth=0.254
PolygonConnect Polygon_F.Cu-CS-MEM-1_ConnectDirect [IsNamedPolygon('F.Cu-CS-MEM-1')] p176: connectstyle=Direct reliefconductorwidth=0.254 reliefentries=4 polygonreliefangle="90 Angle" airgapwidth=0.254
PolygonConnect Polygon_F.Cu-MOSI_ADC_ConnectDirect [IsNamedPolygon('F.Cu-MOSI_ADC')] p177: connectstyle=Direct reliefconductorwidth=0.254 reliefentries=4 polygonreliefangle="90 Angle" airgapwidth=0.254
PolygonConnect Polygon_F.Cu-5V5-6_ConnectDirect [IsNamedPolygon('F.Cu-5V5-6')] p178: connectstyle=Direct reliefconductorwidth=0.254 reliefentries=4 polygonreliefangle="90 Angle" airgapwidth=0.254
PolygonConnect Polygon_F.Cu-GNDA-13_ConnectDirect [IsNamedPolygon('F.Cu-GNDA-13')] p179: connectstyle=Direct reliefconductorwidth=0.254 reliefentries=4 polygonreliefangle="90 Angle" airgapwidth=0.254
PolygonConnect Polygon_F.Cu-GNDA-12_ConnectDirect [IsNamedPolygon('F.Cu-GNDA-12')] p180: connectstyle=Direct reliefconductorwidth=0.254 reliefentries=4 polygonreliefangle="90 Angle" airgapwidth=0.254
PolygonConnect Polygon_F.Cu-BAT+_ConnectDirect [IsNamedPolygon('F.Cu-BAT+')] p181: connectstyle=Direct reliefconductorwidth=0.254 reliefentries=4 polygonreliefangle="90 Angle" airgapwidth=0.254
PolygonConnect Polygon_F.Cu-Net-(IC2-OUT)-1_ConnectDirect [IsNamedPolygon('F.Cu-Net-(IC2-OUT)-1')] p182: connectstyle=Direct reliefconductorwidth=0.254 reliefentries=4 polygonreliefangle="90 Angle" airgapwidth=0.254
PolygonConnect Polygon_F.Cu-Net-(PS2-FB)-2_ConnectDirect [IsNamedPolygon('F.Cu-Net-(PS2-FB)-2')] p183: connectstyle=Direct reliefconductorwidth=0.254 reliefentries=4 polygonreliefangle="90 Angle" airgapwidth=0.254
PolygonConnect Polygon_F.Cu-SCLK_DAC_ConnectDirect [IsNamedPolygon('F.Cu-SCLK_DAC')] p184: connectstyle=Direct reliefconductorwidth=0.254 reliefentries=4 polygonreliefangle="90 Angle" airgapwidth=0.254
PolygonConnect Polygon_F.Cu-GNDA-11_ConnectDirect [IsNamedPolygon('F.Cu-GNDA-11')] p185: connectstyle=Direct reliefconductorwidth=0.254 reliefentries=4 polygonreliefangle="90 Angle" airgapwidth=0.254
PolygonConnect Polygon_F.Cu-Net-(U1-PA4_A1_D1)_ConnectDirect [IsNamedPolygon('F.Cu-Net-(U1-PA4_A1_D1)')] p186: connectstyle=Direct reliefconductorwidth=0.254 reliefentries=4 polygonreliefangle="90 Angle" airgapwidth=0.254
PolygonConnect Polygon_F.Cu-GNDA-10_ConnectDirect [IsNamedPolygon('F.Cu-GNDA-10')] p187: connectstyle=Direct reliefconductorwidth=0.254 reliefentries=4 polygonreliefangle="90 Angle" airgapwidth=0.254
PolygonConnect Polygon_F.Cu-AmplifiedSig_ConnectDirect [IsNamedPolygon('F.Cu-AmplifiedSig')] p188: connectstyle=Direct reliefconductorwidth=0.254 reliefentries=4 polygonreliefangle="90 Angle" airgapwidth=0.254
PolygonConnect Polygon_F.Cu-3V3-4_ConnectDirect [IsNamedPolygon('F.Cu-3V3-4')] p189: connectstyle=Direct reliefconductorwidth=0.254 reliefentries=4 polygonreliefangle="90 Angle" airgapwidth=0.254
PolygonConnect Polygon_F.Cu-S-_ConnectDirect [IsNamedPolygon('F.Cu-S-')] p190: connectstyle=Direct reliefconductorwidth=0.254 reliefentries=4 polygonreliefangle="90 Angle" airgapwidth=0.254
PolygonConnect Polygon_F.Cu-Net-(PS2-FB)-1_ConnectDirect [IsNamedPolygon('F.Cu-Net-(PS2-FB)-1')] p191: connectstyle=Direct reliefconductorwidth=0.254 reliefentries=4 polygonreliefangle="90 Angle" airgapwidth=0.254
PolygonConnect Polygon_F.Cu-GNDA-9_ConnectDirect [IsNamedPolygon('F.Cu-GNDA-9')] p192: connectstyle=Direct reliefconductorwidth=0.254 reliefentries=4 polygonreliefangle="90 Angle" airgapwidth=0.254
PolygonConnect Polygon_F.Cu-Net-(IC3-RG_2)_ConnectDirect [IsNamedPolygon('F.Cu-Net-(IC3-RG_2)')] p193: connectstyle=Direct reliefconductorwidth=0.254 reliefentries=4 polygonreliefangle="90 Angle" airgapwidth=0.254
PolygonConnect Polygon_F.Cu-Net-(IC2-OUT)_ConnectDirect [IsNamedPolygon('F.Cu-Net-(IC2-OUT)')] p194: connectstyle=Direct reliefconductorwidth=0.254 reliefentries=4 polygonreliefangle="90 Angle" airgapwidth=0.254
PolygonConnect Polygon_F.Cu-3V3-3_ConnectDirect [IsNamedPolygon('F.Cu-3V3-3')] p195: connectstyle=Direct reliefconductorwidth=0.254 reliefentries=4 polygonreliefangle="90 Angle" airgapwidth=0.254
PolygonConnect "Polygon_F.Cu-5V USB_ConnectDirect" [IsNamedPolygon('F.Cu-5V USB')] p196: connectstyle=Direct reliefconductorwidth=0.254 reliefentries=4 polygonreliefangle="90 Angle" airgapwidth=0.254
PolygonConnect Polygon_F.Cu-USB_D-_ConnectDirect [IsNamedPolygon('F.Cu-USB_D-')] p197: connectstyle=Direct reliefconductorwidth=0.254 reliefentries=4 polygonreliefangle="90 Angle" airgapwidth=0.254
PolygonConnect Polygon_F.Cu-5V5-5_ConnectDirect [IsNamedPolygon('F.Cu-5V5-5')] p198: connectstyle=Direct reliefconductorwidth=0.254 reliefentries=4 polygonreliefangle="90 Angle" airgapwidth=0.254
PolygonConnect Polygon_F.Cu-CS-MEM_ConnectDirect [IsNamedPolygon('F.Cu-CS-MEM')] p199: connectstyle=Direct reliefconductorwidth=0.254 reliefentries=4 polygonreliefangle="90 Angle" airgapwidth=0.254
PolygonConnect "Polygon_F.Cu-5V Reference_ConnectDirect" [IsNamedPolygon('F.Cu-5V Reference')] p200: connectstyle=Direct reliefconductorwidth=0.254 reliefentries=4 polygonreliefangle="90 Angle" airgapwidth=0.254
PolygonConnect Polygon_F.Cu-Net-(PS2-FB)_ConnectDirect [IsNamedPolygon('F.Cu-Net-(PS2-FB)')] p201: connectstyle=Direct reliefconductorwidth=0.254 reliefentries=4 polygonreliefangle="90 Angle" airgapwidth=0.254
PolygonConnect Polygon_F.Cu-3V3-2_ConnectDirect [IsNamedPolygon('F.Cu-3V3-2')] p202: connectstyle=Direct reliefconductorwidth=0.254 reliefentries=4 polygonreliefangle="90 Angle" airgapwidth=0.254
PolygonConnect Polygon_F.Cu-SCLK_FLASH_ConnectDirect [IsNamedPolygon('F.Cu-SCLK_FLASH')] p203: connectstyle=Direct reliefconductorwidth=0.254 reliefentries=4 polygonreliefangle="90 Angle" airgapwidth=0.254
PolygonConnect Polygon_F.Cu-CS-ADC_ConnectDirect [IsNamedPolygon('F.Cu-CS-ADC')] p204: connectstyle=Direct reliefconductorwidth=0.254 reliefentries=4 polygonreliefangle="90 Angle" airgapwidth=0.254
PolygonConnect Polygon_F.Cu-SCLK_ADC_ConnectDirect [IsNamedPolygon('F.Cu-SCLK_ADC')] p205: connectstyle=Direct reliefconductorwidth=0.254 reliefentries=4 polygonreliefangle="90 Angle" airgapwidth=0.254
PolygonConnect Polygon_F.Cu-GNDA-8_ConnectDirect [IsNamedPolygon('F.Cu-GNDA-8')] p206: connectstyle=Direct reliefconductorwidth=0.254 reliefentries=4 polygonreliefangle="90 Angle" airgapwidth=0.254
PolygonConnect Polygon_F.Cu-SCLK-3_ConnectDirect [IsNamedPolygon('F.Cu-SCLK-3')] p207: connectstyle=Direct reliefconductorwidth=0.254 reliefentries=4 polygonreliefangle="90 Angle" airgapwidth=0.254
PolygonConnect Polygon_F.Cu-GNDA-7_ConnectDirect [IsNamedPolygon('F.Cu-GNDA-7')] p208: connectstyle=Direct reliefconductorwidth=0.254 reliefentries=4 polygonreliefangle="90 Angle" airgapwidth=0.254
PolygonConnect Polygon_F.Cu-MOSI_ConnectDirect [IsNamedPolygon('F.Cu-MOSI')] p209: connectstyle=Direct reliefconductorwidth=0.254 reliefentries=4 polygonreliefangle="90 Angle" airgapwidth=0.254
PolygonConnect "Polygon_F.Cu-ADC DReady-1_ConnectDirect" [IsNamedPolygon('F.Cu-ADC DReady-1')] p210: connectstyle=Direct reliefconductorwidth=0.254 reliefentries=4 polygonreliefangle="90 Angle" airgapwidth=0.254
PolygonConnect Polygon_F.Cu-GNDA-6_ConnectDirect [IsNamedPolygon('F.Cu-GNDA-6')] p211: connectstyle=Direct reliefconductorwidth=0.254 reliefentries=4 polygonreliefangle="90 Angle" airgapwidth=0.254
PolygonConnect Polygon_F.Cu-SCLK-2_ConnectDirect [IsNamedPolygon('F.Cu-SCLK-2')] p212: connectstyle=Direct reliefconductorwidth=0.254 reliefentries=4 polygonreliefangle="90 Angle" airgapwidth=0.254
PolygonConnect Polygon_F.Cu-CS-DAC_ConnectDirect [IsNamedPolygon('F.Cu-CS-DAC')] p213: connectstyle=Direct reliefconductorwidth=0.254 reliefentries=4 polygonreliefangle="90 Angle" airgapwidth=0.254
PolygonConnect Polygon_F.Cu-5V5-4_ConnectDirect [IsNamedPolygon('F.Cu-5V5-4')] p214: connectstyle=Direct reliefconductorwidth=0.254 reliefentries=4 polygonreliefangle="90 Angle" airgapwidth=0.254
PolygonConnect Polygon_F.Cu-3V3-1_ConnectDirect [IsNamedPolygon('F.Cu-3V3-1')] p215: connectstyle=Direct reliefconductorwidth=0.254 reliefentries=4 polygonreliefangle="90 Angle" airgapwidth=0.254
PolygonConnect Polygon_F.Cu-5V5-3_ConnectDirect [IsNamedPolygon('F.Cu-5V5-3')] p216: connectstyle=Direct reliefconductorwidth=0.254 reliefentries=4 polygonreliefangle="90 Angle" airgapwidth=0.254
PolygonConnect Polygon_F.Cu-SCLK-1_ConnectDirect [IsNamedPolygon('F.Cu-SCLK-1')] p217: connectstyle=Direct reliefconductorwidth=0.254 reliefentries=4 polygonreliefangle="90 Angle" airgapwidth=0.254
PolygonConnect Polygon_F.Cu-GNDA-5_ConnectDirect [IsNamedPolygon('F.Cu-GNDA-5')] p218: connectstyle=Direct reliefconductorwidth=0.254 reliefentries=4 polygonreliefangle="90 Angle" airgapwidth=0.254
PolygonConnect Polygon_F.Cu-GNDA-4_ConnectDirect [IsNamedPolygon('F.Cu-GNDA-4')] p219: connectstyle=Direct reliefconductorwidth=0.254 reliefentries=4 polygonreliefangle="90 Angle" airgapwidth=0.254
PolygonConnect Polygon_F.Cu-GNDA-3_ConnectDirect [IsNamedPolygon('F.Cu-GNDA-3')] p220: connectstyle=Direct reliefconductorwidth=0.254 reliefentries=4 polygonreliefangle="90 Angle" airgapwidth=0.254
PolygonConnect Polygon_F.Cu-3V3_ConnectDirect [IsNamedPolygon('F.Cu-3V3')] p221: connectstyle=Direct reliefconductorwidth=0.254 reliefentries=4 polygonreliefangle="90 Angle" airgapwidth=0.254
PolygonConnect "Polygon_F.Cu-ADC DReady_ConnectDirect" [IsNamedPolygon('F.Cu-ADC DReady')] p222: connectstyle=Direct reliefconductorwidth=0.254 reliefentries=4 polygonreliefangle="90 Angle" airgapwidth=0.254
PolygonConnect Polygon_F.Cu-5V5-2_ConnectDirect [IsNamedPolygon('F.Cu-5V5-2')] p223: connectstyle=Direct reliefconductorwidth=0.254 reliefentries=4 polygonreliefangle="90 Angle" airgapwidth=0.254
PolygonConnect Polygon_F.Cu-GNDA-2_ConnectDirect [IsNamedPolygon('F.Cu-GNDA-2')] p224: connectstyle=Direct reliefconductorwidth=0.254 reliefentries=4 polygonreliefangle="90 Angle" airgapwidth=0.254
PolygonConnect Polygon_F.Cu-GNDA-1_ConnectDirect [IsNamedPolygon('F.Cu-GNDA-1')] p225: connectstyle=Direct reliefconductorwidth=0.254 reliefentries=4 polygonreliefangle="90 Angle" airgapwidth=0.254
PolygonConnect Polygon_F.Cu-SCLK_ConnectDirect [IsNamedPolygon('F.Cu-SCLK')] p226: connectstyle=Direct reliefconductorwidth=0.254 reliefentries=4 polygonreliefangle="90 Angle" airgapwidth=0.254
PolygonConnect Polygon_F.Cu-Net-(IC3-RG_1)_ConnectDirect [IsNamedPolygon('F.Cu-Net-(IC3-RG_1)')] p227: connectstyle=Direct reliefconductorwidth=0.254 reliefentries=4 polygonreliefangle="90 Angle" airgapwidth=0.254
PolygonConnect Polygon_F.Cu-GNDA_ConnectDirect [IsNamedPolygon('F.Cu-GNDA')] p228: connectstyle=Direct reliefconductorwidth=0.254 reliefentries=4 polygonreliefangle="90 Angle" airgapwidth=0.254
PolygonConnect Polygon_F.Cu-BAT-_ConnectDirect [IsNamedPolygon('F.Cu-BAT-')] p229: connectstyle=Direct reliefconductorwidth=0.254 reliefentries=4 polygonreliefangle="90 Angle" airgapwidth=0.254
PolygonConnect Polygon_F.Cu-5V5-1_ConnectDirect [IsNamedPolygon('F.Cu-5V5-1')] p230: connectstyle=Direct reliefconductorwidth=0.254 reliefentries=4 polygonreliefangle="90 Angle" airgapwidth=0.254
PolygonConnect Polygon_F.Cu-5V5_ConnectDirect [IsNamedPolygon('F.Cu-5V5')] p231: connectstyle=Direct reliefconductorwidth=0.254 reliefentries=4 polygonreliefangle="90 Angle" airgapwidth=0.254
RoutingVias [All] p1: holewidth=0.711 width=1.27 viastyle="Through Hole" minholewidth=0.711 minwidth=1.27 maxholewidth=0.711 maxwidth=1.27
SilkToSilkClearance [All] p1: silktosilkclearance=0
SilkToSolderMaskClearance [IsPad] p1: minsilkscreentomaskgap=0 clearancetoexposedcopper=TRUE
SolderMaskExpansion [All] p1: expansion=0.102 istentingtop=FALSE
Width [All] p1: maxlimit=10 minlimit=0.254 preferedwidth=0.254 minimp=50.000000 maximp=50.000000 favimp=50.000000